# Altium PCB UKU205w.PcbDoc (part 2 of 3)
Units mm, origin at the board's own origin, x right, y up, seen from the top; angles counter-clockwise.
Board outline 374.65 x 264.35 mm, 2 copper layers (Top Layer, Bottom Layer); 276 components, 443 nets, 1000 pads, 796 vias.
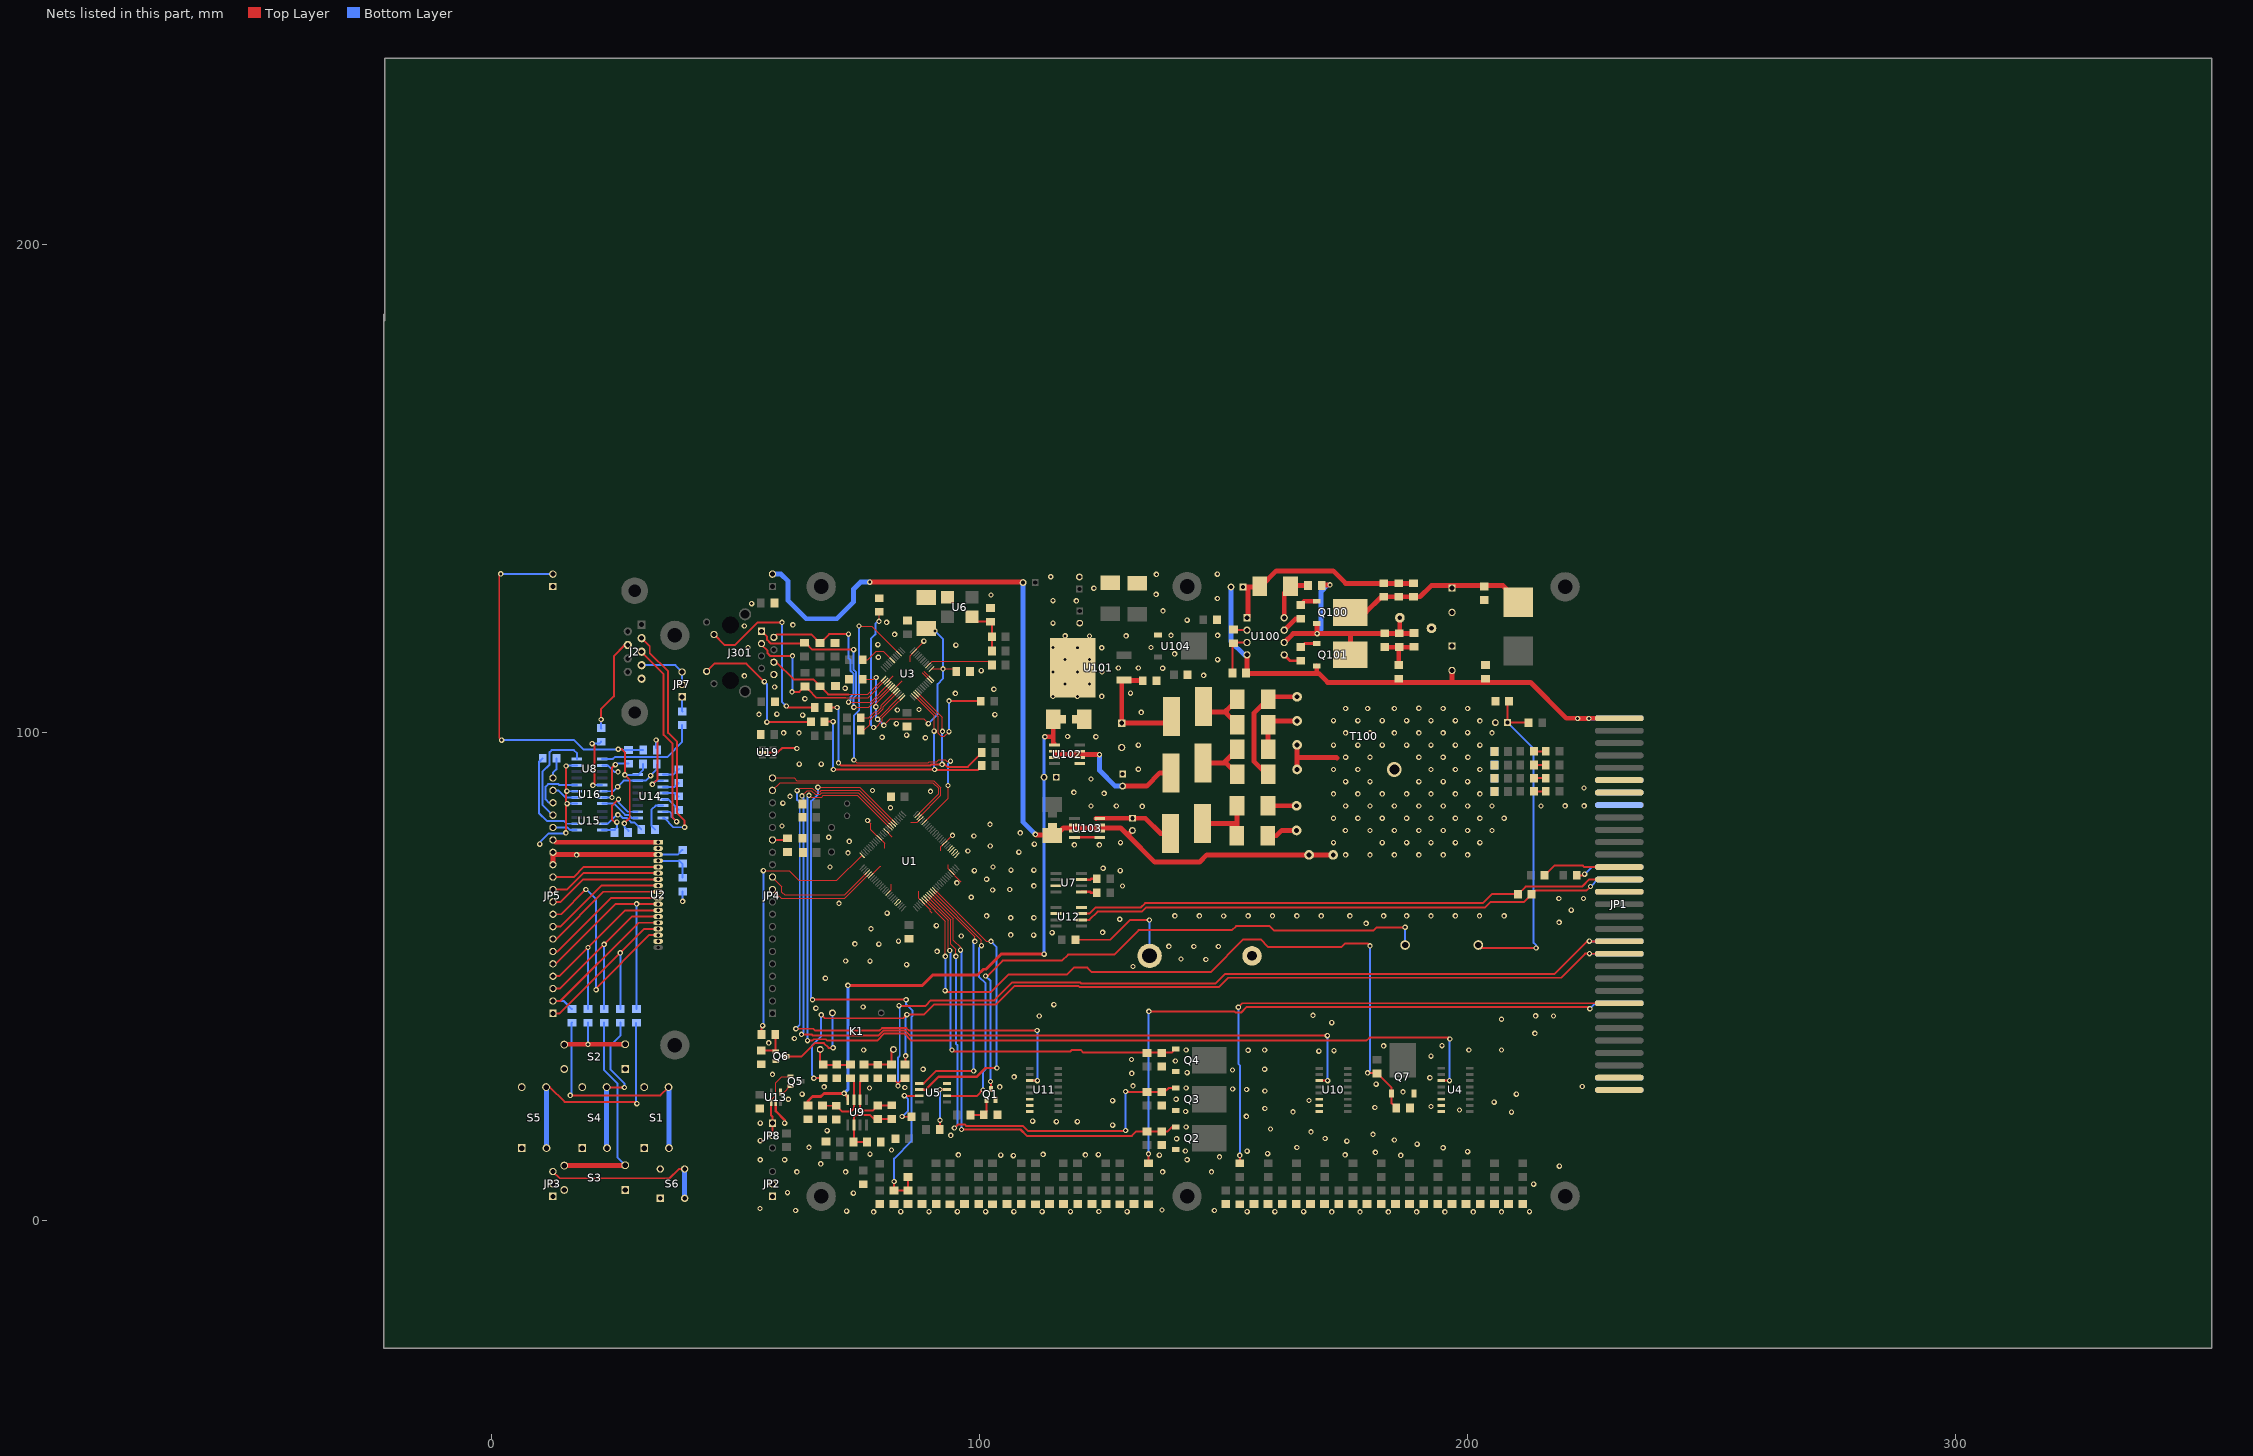
[diagram p2: the nets of this part, all layers, seen from the top]

## Via types
v1: diameter 1.1, hole 0.6, Top Layer to Bottom Layer, 795 vias
v2: diameter 3, hole 2, Top Layer to Bottom Layer, 1 vias

## Nets (pads, with @x,y where several pads share a name; then routed paths per layer and width w, separated by ;. In a path a pad name is that pad's centre, name@x,y a point inside that pad or via, vN(x,y) a via of type N, cw(c..) or ccw(c..) an arc to the next point about the centre after c; other vN are vias at no path point) (continued)
+IAKB: JP1.39 JP1.40 R62.1 R63.2 | length 201.7
  Top Layer w0.4: v1@66.3,29.2 66.338,29.162 R63.2@67.893,29.162 ; v1(67.5,42.15) 68.2,41.45 84.3,41.45 v1(85.05,42.2) 88.55,42.2 90.65,44.3 103.35,44.3 107.15,48.1 120.2,48.1 120.45,47.85 149,47.85 150.9,49.75 219.15,49.75 224.1,54.7 v1(225,54.7) 225.025,54.675 JP1.39@231.089,54.675 ; R62.1@84.65,31.95 84.678,31.978 84.8,32.1 v1@84.8,33.5
  Bottom Layer w0.4: v1@66.3,29.2 65.6,29.9 65.6,35.85 67.5,37.75 v1(67.5,42.15) ; v1@84.8,33.5 84.8,41.95 v1(85.05,42.2) ; v1(225,54.7) 225.025,54.675 JP1.40@231.089,54.675
  other v1: 66,29.15 84.8,33.75
+UOUT: 
-5V: C13.1 C16.2 C57.2 C105.2 U9.4 U102.1 | length 127.3
  Top Layer w0.6: C16.2@64.798,23.545 64.798,24.498 65.7,25.4 67.4,25.4 68.05,26.05 v1(72.2,26.05) 72.942,25.308 U9.4@72.942,24.761 ; v1(72.95,48.2) 88.25,48.2 90.35,50.3 99.55,50.3 100.75,51.5 101.3,51.5 104.4,54.6 v1(113.2,54.6)
  Top Layer w1: v1(113.35,99.15) 115.061,99.15 ; C105.2@115.061,102.744 115.061,97.889 U102.1@115.2,97.75
  Bottom Layer w0.6: v1(72.2,26.05) 72.95,26.8 v1(72.95,48.2) ; v1(113.2,54.6) 113.2,99 v1(113.35,99.15)
-5V_IZ: 
-5VIZ: C14.1 C59.2 C107.2 C108.2 JP6.2 T100.8 T100.9 U103.2 U103.3 U103.6 U103.7 | length 181.6
  Top Layer w1: v1(77.45,130.85) 108.85,130.85 C59.2@108.9,130.8 ; v1(111.4,79.15) 111.55,79 C108.2@114.9,79 ; C108.2@114.7,79.05 115.75,79.05 117.15,80.45 128.9,80.45 130.335,79.015 ; C107.2@131.292,79.939 130.368,79.015 130.335,79.015 ; T100.8@172.45,74.95 167.45,74.95 146.55,74.95 145.05,73.45 135.9,73.45 130.335,79.015
  Bottom Layer w1: JP6.2@57.5,132.49 59.26,132.49 60.7,131.05 60.7,127.05 64.4,123.35 70.7,123.35 74.15,126.8 74.15,129.45 75.55,130.85 v1(77.45,130.85) ; C59.2@108.9,130.8 108.9,81.65 v1(111.4,79.15)
-48V: C100.2 C106.2 C114.2 C117.2 JP1.1 JP1.2 Q101.3 R109.2 U100.4 | length 114.3
  Top Layer w1: C114.2@154.7,112.15 169.45,112.15 171.3,110.3 212.9,110.3 220.25,102.95 JP1.1@231.089,102.95 ; U100.4@154.784,115.933 154.784,112.216 154.825,112.175 154.85,112.15 C114.2@154.85,112.2 ; Q101.3@169.069,113.665 169.069,112.331 169.1,112.3 ; C106.2@196.793,112.751 196.793,110.393 196.8,110.385 196.8,110.35 ; v1(222.55,102.9) v1(224.85,102.9)
  Bottom Layer w1: C100.2@151.45,129.85 151.489,129.811 151.489,118.661 154.217,115.933 U100.4@154.784,115.933 ; v1(222.55,102.9) 222.6,102.95 JP1.2@231.089,102.95
-IAKB: JP1.37 JP1.38 R61.2 R62.2 | length 179.6
  Top Layer w0.4: R61.2@81.893,29.162 82.088,29.162 v1@83.25,28 ; v1@83.219,28.031 84.438,29.25 R62.2@84.7,29.25 ; v1(83.45,44.05) 83.5,44 88.9,44 90,45.1 103,45.1 106.7,48.8 120.55,48.8 120.75,48.6 148.35,48.6 150.3,50.55 217.85,50.55 224.55,57.25 v1(224.95,57.25) 225,57.2 JP1.37@231.1,57.2
  Bottom Layer w0.4: v1@83.25,28 83.25,33.4 83.6,33.75 83.6,43.9 v1(83.45,44.05) ; v1(224.95,57.25) 224.975,57.225 JP1.38@231.089,57.225
  other v1: 83.25,27.6
-UOUT: 
CANH: JP1.27 R129.2 U12.7 | length 113.1
  Top Layer w0.4: U12.7@120.839,62.882 122.432,62.882 123.75,64.2 133.05,64.2 133.9,65.05 203.1,65.05 204.95,66.9 R129.2@210.2,66.9 ; R129.2@210.312,66.857 211.906,68.45 223.45,68.45 224.9,69.9 JP1.27@231.089,69.9
CANL: JP1.28 R129.1 U12.6 | length 113.7
  Top Layer w0.4: U12.6@120.839,61.612 122.462,61.612 124.15,63.3 133.25,63.3 134.15,64.2 203.6,64.2 204.65,65.25 211.506,65.25 213.856,67.6 224.35,67.6 v1(225.2,68.45)
  Bottom Layer w0.4: v1(225.2,68.45) 226.65,69.9 JP1.28@231.089,69.9
DB4: 
GND: BT1.2 C1.2 C2.2 C3.2 C4.2 C5.2 C6.2 C7.2 C8.2 C9.2 C10.2 C11.1 C12.2 C13.2 C15.1 C16.1 C17.1 C18.2 C19.2 C20.2 C21.1 C22.1 C23.2 C24.1 C25.1 C31.1 C33.1 C34.2 C35.2 C36.1 C37.1 C38.1 C39.1 C40.1 C41.1 C42.2 C43.2 C44.2 C45.2 C46.2 C47.2 C48.2 C49.2 C50.2 C51.2 C52.2 C53.2 C54.2 C55.2 C56.2 C57.1 C58.2 C101.2 C102.2 C104.1 C105.1 C109.1 C110.2 C301.1 C302.1 C303.1 C304.1 D1.1 D3.1 D4.1 D5.1 D7.1 D8.1 J301.8 JP1.11 JP1.12 JP1.13 JP1.14 JP1.59 JP1.60 JP1.61 JP1.62 JP2.1 JP2.2 Q1.2 Q2.3 Q3.3 Q4.3 Q6.2 Q7.3 R10.2 R12.2 R13.2 R14.2 R15.2 R16.2 R23.1 R24.1 R26.1 R27.1 R28.1 R29.1 R36.1 R49.1 R57.1 R58.1 R60.1 R74.2 R75.2 R76.2 R77.2 R78.2 R111.1 R112.1 R113.1 R114.1 R117.1 R118.1 R122.2 R126.2 R127.2 R128.2 T100.4 T100.5 U1.11 U1.15 U1.31 U1.41 U1.55 U1.72 U1.83 U1.97 U3.15 U3.19 U3.35 U3.36 U3.47 U4.6 U4.7 U4.8 U5.4 U6.2 U7.3 U10.6 U10.7 U10.8 U11.6 U11.7 U11.8 U12.2 U12.8 U13.2 U19.2 U101.4 U102.5 U104.1 | length 69.9
  Top Layer w0.25: v1(77,82) 77.7,81.3 77.7,80.136 80.5,77.336 80.5,76.25 ; U1.31@77.645,70.645 79.65,72.65 79.7,72.65 ; U1.11@80.827,79.837 82,78.664 82,78.65 ; U3.15@80.998,110.347 82.301,111.65 ; U1.41@81.181,67.109 81.9,67.828 81.9,68.95 ; U3.19@82.412,108.933 84.129,110.65 ; 85.75,114.55 85.75,115.806 v1@88.55,118.606 ; 85.9,81.6 87.186,81.6 U1.97@87.898,82.312 ; 87.5,67.45 87.5,66.093 89.85,63.743 89.85,63.354 90.142,63.062 ; 88.2,112.25 88.2,112.231 U3.35@89.73,110.7 ; 88.538,112.6 U3.36@90.084,111.054 ; 92.05,75.75 92.05,76.564 94.4,78.914 v1(94.4,78.95) ; 93.5,72.9 93.5,72.114 96.15,69.464 96.15,69.45
  Top Layer w0.4: U19.2@55.434,95.942 58.601,95.942 59.509,96.85 62.4,96.85 v1(62.5,96.75)
  Top Layer w0.5: U13.2@58.2,24.175 58.2,22.4 60,20.6 v1(60,19.95)
  Top Layer w1: T100.4@165.05,92.45 T100.5@165.05,97.5 ; 165.05,94.9 173.099,94.9 173.199,94.8
  other v1: 78.25,1.75 172.15,1.75 177.95,1.75 183.75,1.75 189.55,1.75 195.35,1.75 201.15,1.75 206.95,1.75 83.8,1.8 89.6,1.8 95.4,1.8 101.2,1.8 107,1.8 112.8,1.8 118.6,1.8 130.2,1.8 154.799,1.8 160.499,1.8 166.399,1.8 212.699,1.8 124.4,1.85 72.7,1.9 62.25,2.05 148.1,2.05 137.35,2.15 54.95,2.45 74.1,5.6 60.6,5.7 213.55,7.45 62.5,9.95 72.5,9.95 137.5,9.95 147.5,9.95 218.8,11.15 67.4,11.6 55,12.45 60,12.45 142.5,12.45 149.15,13.05 106.9,13.3 186.299,13.35 104.3,13.4 136.8,13.4 95.6,13.45 121.65,13.45 174.899,13.45 124.3,13.5 113,13.55 77.5,13.6 158.999,13.7 181.1,13.95 199.999,14.1 154.799,14.2 142.15,14.25 81.9,14.45 194.999,14.9 164.999,14.95 65,15 189.65,15.65 175.25,16.25 55,16.35 184.999,16.5 140.35,16.75 170.799,16.8 94.05,17.45 180.6,17.65 167.899,18.15 68.7,18.4 159.6,18.75 142.3,19.15 127.25,19.55 55,19.95 115.7,20.25 120,20.25 110.85,20.35 154.65,21.35 208.999,22.2 164.2,22.25 142.2,22.35 198.35,22.65 158.45,22.95 180.999,23.15 192.5,23.35 205.45,24.25 127.25,24.55 167.499,24.6 60.75,24.85 140.25,24.85 63.6,25.9 209.999,25.9 186.75,26.35 158.45,26.55 154.699,26.85 151.85,26.95 77.4,27.15 142.3,27.15 84.65,27.25 68.1,27.4 104.1,27.4 223.5,27.45 131.4,27.6 181.25,27.95 192.25,29.25 107.05,29.45 57.5,29.95 131.15,30.15 142.5,30.3 151.8,30.85 88.4,31 158.399,31 140.1,32.7 131.1,33 192.499,33.7 169.499,34.7 172.599,34.8 154.999,34.9 76.2,34.95 142.3,34.95 158.4,34.95 200.25,34.95 206.95,34.95 182.799,35.8 194.75,35.85 56.75,36.4 62,37.3 213.8,38.35 172.15,40.55 206.95,41.25 112.2,41.9 217.599,41.9 213.95,41.95 168.3,42.05 66.4,43.5 76.1,43.75 115.2,44.25 68.35,49.65 131.4,52.05 85,52.45 77.5,53.15 72.5,53.2 146.35,53.5 141.25,53.6 91.25,55.15 143.9,56.15 148.9,56.15 138.75,56.2 79.3,56.65 74.4,56.7 83.35,57.25 96.2,58.3 111.05,58.5 106.35,58.55 114.85,59 125.2,59.05 77.7,59.8 91.1,60.45 179.2,60.9 218.75,61.1 128.7,61.75 106.35,62.05 111.1,62.05 150,62.4 101.4,62.45 140,62.45 145,62.45 155,62.45 160,62.45 165,62.45 170,62.45 175.85,62.45 182.8,62.45 187.5,62.45 192.5,62.45 197.5,62.45 202.45,62.45 207.5,62.45 81,63 221.25,63.6 71.15,65 218.7,66 223.75,66 98.25,66.25 102.65,67.75 106.15,67.85 129.25,68.55 111.1,68.6 95.3,69.2 101.4,69.95 98.9,71.7 128.8,71.7 106.4,71.8 111.1,71.8 125.3,72.2 69.3,72.45 102.7,72.45 174.999,74.95 179.999,74.95 184.999,74.95 189.999,74.95 195,74.95 199.999,74.95 73,75.35 108,75.5 97.55,75.75 102.15,76.75 119.4,77 124.5,77 111.2,77.15 128.85,77.45 172.499,77.45 182.5,77.45 187.499,77.45 192.5,77.45 197.499,77.45 202.499,77.45 73.25,77.7 69.05,78.55 98.8,78.8 108.3,79.45 174.95,79.95 180,79.95 185,79.95 190,79.95 195,79.95 200,79.95 204.999,79.95 59.45,80.85 102.1,81.2 172.5,82.45 177.499,82.45 182.499,82.45 187.5,82.45 192.5,82.45 197.499,82.45 202.5,82.45 207.499,82.45 81.7,84.6 133.3,84.9 122.8,84.95 128,84.95 174.999,84.95 179.999,84.95 185,84.95 189.999,84.95 195,84.95 199.999,84.95 205,84.95 215.05,84.95 219.999,85 223.899,85 59.65,85.55 61.1,86.95 172.499,87.45 177.5,87.45 182.5,87.45 187.499,87.45 192.499,87.45 197.499,87.45 202.499,87.45 125.5,87.55 119.3,87.75 89.9,87.95 78,88.15 223.85,88.65 174.999,89.95 179.999,89.95 190,89.95 195,89.95 200,89.95 122.8,90.5 172.499,92.45 177.5,92.45 192.499,92.45 197.5,92.45 202.499,92.45 132.5,92.5 63,93.55 67.5,93.55 175,94.95 179.999,94.95 189.999,94.95 194.999,94.95 200.05,94.95 132.5,97.45 172.499,97.45 177.5,97.45 182.499,97.45 187.499,97.45 192.5,97.45 197.499,97.45 202.5,97.45 88.85,98.95 80,99.05 123.8,99.15 118,99.2 85,99.5 59.8,99.95 62.95,99.95 174.999,99.95 180,99.95 185,99.95 189.999,99.95 194.999,99.95 205,99.95 199.999,100 82.9,101.85 202.499,102.4 172.499,102.45 177.499,102.45 182.5,102.45 187.5,102.45 192.499,102.45 197.499,102.45 63.7,103.6 103.1,103.7 54.75,103.75 58.4,103.8 133.1,104.15 83.1,104.65 87.55,104.75 185,104.95 200,104.95 174.999,104.95 179.499,104.95 194.999,104.95 189.999,105 64.15,106.95 115,107.45 120,107.45 125,107.45 95,108.05 130.9,108.1 102.9,108.9 72.4,109.1 57.95,109.35 117.5,109.95 122.5,109.95 51.75,111.65 145.9,111.75 120,112.4 115.05,112.45 125.05,112.45 100.3,112.7 137.5,113.2 128.4,113.25 132.5,113.25 117.5,114.95 122.5,114.95 148.75,114.95 79.2,115.45 139.95,116.15 120,117.4 125,117.4 52.5,117.45 115,117.45 135.1,117.45 95.1,117.95 79.1,118.05 88.55,118.75 122.5,119.8 117.5,119.85 130,119.85 139.2,119.95 148.75,119.95 82.55,120.15 51.75,121.85 61.7,122.1 115,122.45 80.9,122.6 142.5,123.05 137.55,124.95 53.25,126.45 119.8,127 115,127.05 148.7,127.5 102.3,128.2 136.15,128.35 123.4,129.6 114.55,131.95 136.2,132.45 148.7,132.5
  other v2: 185,92.45
I1: JP1.47 R6.2 | length 110.5
  Top Layer w0.4: v1(153,43.7) 153.825,44.525 JP1.47@231.075,44.525 ; v1(153.3,13.35) 153.307,13.343 R6.2@153.307,11.738
  Bottom Layer w0.4: v1(153,43.7) 153,32.1 153.307,31.793 v1@153.307,13.343
I2: JP1.48 R7.2 | length 128.7
  Top Layer w0.4: v1@134.6,13.15 134.607,13.143 R7.2@134.607,11.738 ; v1(134.65,42.85) 152.2,42.85 152.45,42.6 153.55,42.6 154.75,43.8 224.65,43.8 v1(225.05,43.4)
  Bottom Layer w0.4: v1@134.6,13.15 v1@134.6,42.8 ; v1(225.05,43.4) 226.175,44.525 JP1.48@231.089,44.525
  other v1: 134.6,13.65
NetA1_1: A1.1 Q1.3 | length 118.2
  Top Layer w0.4: v1(101.2,50.1) 101.55,50.1 104.7,53.25 116.85,53.25 118.1,54.5 127.55,54.5 132.55,59.5 151.7,59.5 152.55,60.35 159.4,60.35 160.35,59.4 180.65,59.4 181.35,60.1 v1(187.2,60.1) ; v1(102.2,28.5) 102.3,28.5 102.302,28.498 Q1.3@102.302,26.948
  Bottom Layer w0.4: v1(101.2,50.1) 102.2,49.1 v1(102.2,28.5) ; A1.1@187.197,56.462 187.197,60.097 v1(187.2,60.1)
NetA1_2: A1.2 C19.1 R56.1 R57.2 | length 69.5
  Top Layer w0.4: A1.2@202.2,56.4 202.75,55.85 v1(214.05,55.85) ; R57.2@208.5,106.4 208.157,106.057 208.157,102.043 R56.1@212.488,102.043
  Bottom Layer w0.4: C19.1@208.189,102.058 213.55,96.697 213.55,56.9 214.05,56.4 v1(214.05,55.85)
NetBT1_1: BT1.1 D6.1 | length 24.2
  Top Layer w0.4: D6.1@119.595,57.541 126.741,57.541 130.8,61.6 v1(134.75,61.6)
  Bottom Layer w0.4: v1(134.75,61.6) 134.805,61.545 BT1.1@134.805,54.241
NetC9_1: C9.1 C10.1 C20.1 U3.18 U3.23 U3.37 | length 63.9
  Top Layer w0.25: C10.1@76.005,110.948 78.298,110.948 v1@78.65,111.3 ; v1(78.7,105.3) 78.7,105.928 U3.18@82.058,109.286 ; v1(79.05,102.75) 79.058,102.75 U3.23@83.826,107.518 ; v1(80.35,101.5) 81.65,102.8 88.5,102.8 v1(89.45,101.85) ; U3.37@90.084,113.069 94.678,113.069 C9.1@95.195,112.552
  Top Layer w0.4: C20.1@88.8,121.3 90.311,121.339 v1(90.8,120.85)
  Bottom Layer w0.4: v1@78.65,111.3 78.7,111.25 78.7,103.15 79.075,102.775 v1(80.35,101.5) ; v1(89.45,101.85) 89.5,101.9 89.5,101.95 91.35,103.8 91.35,109.95 92.45,111.05 92.45,119.2 v1(90.8,120.85)
  other v1: 78.75,111.3 92.45,113.069
NetC18_1: C18.1 R50.1 R51.1 U6.4 | length 10.3
  Top Layer w0.4: U6.4@98.4,123.75 99.412,122.738 C18.1@102.207,122.738 102.488,122.457 R50.1@102.488,119.643 R51.1@102.488,116.743
NetC22_2: C22.2 K1.3 R61.1 R64.1 | length 8.9
  Top Layer w0.4: R64.1@76.25,31.85 76.362,31.962 R61.1@81.893,31.962 81.893,34.593 K1.3@82.3,35
NetC23_1: C23.1 K1.1 R63.1 R65.1 | length 9
  Top Layer w0.4: K1.1@67.294,35.06 67.294,32.456 67.9,31.85 R65.1@73.45,31.85
NetC24_2: C24.2 C32.2 R59.1 R66.1 U9.6 | length 16.2
  Top Layer w0.4: U9.6@74.212,19.561 74.212,21.162 74.65,21.6 77.55,21.6 78.35,20.8 81.931,20.8 C32.2@81.943,20.812 ; U9.6@74.25,19.65 74.25,16.2 74.15,16.1 74.2,16.05 C24.2@76.85,16.05
NetC26_1: C26.1 U14.3 | length 3.5
  Bottom Layer w0.4: U14.3@35.089,88.863 37.463,88.863 C26.1@38.25,89.65
NetC26_2: C26.2 U14.1 | length 3.7
  Bottom Layer w0.4: U14.1@35.089,91.403 37.203,91.403 C26.2@38.3,92.5
NetC27_1: C27.1 U14.2 | length 14.2
  Top Layer w0.4: v1(32.9,89.4) 33.95,90.45 33.95,98.2 v1(33.65,98.5)
  Bottom Layer w0.4: v1(32.9,89.4) 33.633,90.133 U14.2@35.089,90.133 ; v1(33.65,98.5) 33.65,96.8 C27.1@33.9,96.55
NetC27_2: C27.2 C28.1 JP9.2 R47.1 R48.2 U14.16 | length 99.5
  Top Layer w0.4: v1@1.5,132.55 1.5,98.95 v1(2,98.45) ; v1(25.9,96.6) 26.6,96.6 27.25,95.95 v1(27.25,91.35) 28.25,90.35 28.25,82.5 v1(27.15,81.4)
  Bottom Layer w0.4: v1@1.5,132.55 12.423,132.55 JP9.2@12.488,132.485 ; v1(2,98.45) 16.85,98.45 18.75,96.55 26.65,96.55 ; 26.669,96.531 26.757,96.443 C27.2@31.012,96.443 ; v1(27.15,81.4) 27.15,80.706 R47.1@28.012,79.843 ; v1(27.25,91.35) 30,91.35 30.995,92.345 C28.1@30.995,93.548
  other v1: 1.8,132.55
NetC28_2: C28.2 C30.2 J2.5 JP9.1 U8.2 U14.15 U15.7 U16.2 | length 28
  Bottom Layer w0.4: U15.7@22.589,81.318 23.768,81.318 25.5,83.05 26.25,83.05 26.8,82.5 27.65,82.5 27.769,82.381 ; U16.2@22.611,87.982 24.832,87.982 v1(25.761,88.911) 27,90.15 31.5,90.15 33.8,92.45 C28.2@33.8,93.548 ; U8.2@22.611,93.282 23.768,93.282 25.1,91.95 v1(25.85,91.95) ; 27.7,82.45 27.769,82.381 ; C30.2@30.605,80.152 29.157,81.6 28.55,81.6 27.769,82.381
  other v1: 25.8,83.15 32.535,91.185
NetC29_1: C29.1 U14.4 | length 3.4
  Bottom Layer w0.4: U14.4@35.089,87.593 37.507,87.593 C29.1@38.2,86.9
NetC29_2: C29.2 U14.5 | length 4.1
  Bottom Layer w0.4: U14.5@35.089,86.323 36.129,86.323 C29.2@38.298,84.155
NetC30_1: C30.1 U14.6 | length 7
  Bottom Layer w0.4: C30.1@33.405,80.152 32.75,80.807 32.75,84.25 33.553,85.053 U14.6@35.089,85.053
NetC32_1: C32.1 R59.2 R64.2 U9.2 | length 13.7
  Top Layer w0.4: R64.2@76.293,29.162 75.482,28.351 U9.2@75.482,24.761 75.482,22.868 75.85,22.5 78.019,22.5 79.131,23.612 C32.1@81.943,23.612
NetC35_1: C35.1 R60.2 R65.2 U9.3 | length 13.7
  Top Layer w0.4: R60.2@67.757,23.538 67.782,23.512 C35.1@70.593,23.512 71.756,22.35 73.65,22.35 74.212,22.912 U9.3@74.212,24.761 74.212,28.443 R65.2@73.493,29.162
NetC100_1: C100.1 D100.1 R100.2 R101.2 R102.2 U100.1 | length 43.9
  Top Layer w1: C100.1@153.989,129.858 157.508,129.858 160.8,133.15 172.45,133.15 175,130.6 182.95,130.6 R102.2@189,130.6 ; U100.1@154.8,123.5 155,123.7 155,129.85
NetC101_1: C101.1 C109.2 L100.2 U101.1 | length 23.6
  Top Layer w0.7: L100.2@139.268,103.343 L100.2@139.293,103.343
  Top Layer w1: C109.2@133.405,110.648 133.352,110.7 129.5,110.7 129.093,110.293 C101.1@129.093,101.951 137.901,101.951 139.28,103.33 L100.2@139.293,103.343
NetC103_1: C103.1 FU100.2 Q100.4 R100.1 R101.1 R102.1 R103.1 | length 38.2
  Top Layer w1: Q100.4@175.919,124.65 179.15,124.65 182.35,127.85 189.15,127.85 190.249,127.85 192.549,130.15 197.4,130.15 207.25,130.15 210.2,127.2 FU100.2@210.2,126.8
NetC103_2: C103.2 C106.1 R103.2 R109.1 T100.1
NetC104_2: C104.2 L101.2 U102.2 U102.3 U102.6 U102.7 | length 29.6
  Top Layer w1: 115.3,95.55 124.5,95.55 v1(124.55,95.5) ; C104.2@129.25,89.05 134.189,89.039 136.893,91.743 L101.2@139.168,91.743
  Bottom Layer w1: v1(124.55,95.5) 124.55,92.25 127.75,89.05 C104.2@129.25,89.05
NetC107_1: C107.1 L102.2 U103.8 | length 16.5
  Top Layer w1: U103.8@123.85,82.4 123.889,82.439 133.961,82.439 137.057,79.343 L102.2@139.068,79.343
NetC111_1: C111.1 D100.2 U100.8 | length 10.6
  Top Layer w1: U100.8@162.403,123.553 U100.8@162.404,123.553 162.404,128.654 163.902,130.152 C111.1@167.295,130.152
NetC111_2: C111.2 Q100.3 Q101.4 R106.1 R107.1 R108.1 T100.2 U100.6 | length 49.1
  Top Layer w1: U100.6@162.404,118.473 164.231,120.3 188.881,120.3 R106.1@188.994,120.413 ; v1@169.15,120.4 Q100.3@169.15,122.3 ; C111.2@170.05,130.25 171.3,130.25 v1@171.35,130.3 ; Q101.4@175.9,116 176,116.1 176,120.3 ; R107.1@186.1,120.3 T100.2@186.1,123.55
  Bottom Layer w1: v1(169.15,120.3) 169.95,121.1 169.95,128.9 v1@171.35,130.3
  other v1: 171.8,130.3
NetC114_1: C114.1 R105.1 U100.3 | length 9
  Top Layer w0.4: C114.1@151.788,112.243 151.788,118.119 R105.1@152.007,118.338 152.142,118.473 U100.3@154.784,118.473
NetC117_1: C117.1 R106.2 R107.2 R108.2 | length 10
  Top Layer w1: R108.2@182.8,117.5 189.1,117.5 R106.2@189.15,117.45 ; C117.1@185.893,113.862 185.893,117.443 R107.2@185.95,117.5
NetD101_1: D101.1 D102.2 T100.3 | length 24
  Top Layer w1: D102.2@158.95,91.35 156.2,94.1 156.2,104 159.55,107.35 T100.3@165.05,107.35
NetD101_2: D101.2 D103.2 L100.1 | length 12.3
  Top Layer w1: L100.1@145.872,105.375 146.997,104.25 150.55,104.25 ; D103.2@152.809,101.656 152.844,101.656 150.5,104 150.5,104.509 D101.2@152.809,106.819
NetD102_1: D102.1 D104.1 L101.1 | length 11.9
  Top Layer w1: L101.1@145.772,93.775 150.465,93.775 ; D102.1@152.809,91.431 150.4,93.841 150.4,94.185 D104.1@152.809,96.594
NetD103_1: D103.1 D104.2 T100.6 | length 11.4
  Top Layer w1: D104.2@159.15,96.5 159.107,96.543 159.1,96.55 159.1,101.65 159.85,102.4 T100.6@165.05,102.4
NetD105_1: D105.1 T100.7 | length 5.9
  Top Layer w1: D105.1@159.1,85 T100.7@164.95,85
NetD105_2: D105.2 D106.2 L102.1 | length 13.2
  Top Layer w1: L102.1@145.672,81.375 152.625,81.375 152.691,81.309 ; D106.2@152.691,78.856 152.691,84.991 D105.2@152.7,85
NetD106_1: D106.1 T100.10 | length 6.4
  Top Layer w1: D106.1@159.05,78.865 D106.1@159.041,78.856 160.806,78.856 161.9,79.95 T100.10@164.95,79.95
NetJ2_2: J2.2 U14.8 | length 47.6
  Top Layer w0.4: J2.2@30.684,119.361 32.35,117.695 32.35,116.3 36.1,112.55 36.1,99.95 37.95,98.1 37.95,83.5 39.5,81.95 v1(39.5,80.6)
  Bottom Layer w0.4: U14.8@35.089,82.513 35.287,82.513 37.2,80.6 v1(39.5,80.6)
NetJ2_3: J2.3 U14.7 | length 41.8
  Top Layer w0.4: J2.3@30.684,116.591 30.684,116.466 35.2,111.95 35.2,99.55 37.05,97.7 37.05,82.55 v1(37.85,81.75)
  Bottom Layer w0.4: U14.7@35.089,83.783 36.467,83.783 36.85,83.4 36.85,82.75 v1(37.85,81.75)
NetJ2_4: J2.4 JP7.2 JP7.3 | length 11.4
  Bottom Layer w0.4: J2.4@30.684,113.821 37.589,113.821 39,112.41 JP7.2@39,109.95
NetJ2_7: J2.7 R52.2 | length 19.8
  Top Layer w0.4: v1@22.4,102.3 22.4,104.85 25,107.45 25,115.7 27.276,117.976 J2.7@27.844,117.976
  Bottom Layer w0.4: v1@22.4,102.3 22.4,100.85 R52.2@22.45,100.8
  other v1: 22.4,102.7
NetJ301_1: J301.1 R301.1 U3.17 | length 42.4
  Top Layer w0.25: v1(74.2,105.2) 77.265,105.2 U3.17@81.705,109.64
  Top Layer w0.4: J301.1@55.25,120.795 56.4,119.645 56.4,119 57.1,118.3 64,118.3 64.4,118.3 65.7,117 v1(74.15,117)
  Bottom Layer w0.4: v1(74.15,117) 74.15,112.855 74.65,112.355 74.65,107.644 74.15,107.144 74.15,105.25 v1(74.2,105.2)
NetJ301_2: J301.2 R302.2 U3.16 | length 41.7
  Top Layer w0.25: v1(73.1,106.25) 77.608,106.25 U3.16@81.351,109.993
  Top Layer w0.4: J301.2@57.8,119.525 58.425,120.15 65.45,120.15 67.25,118.35 69.1,120.2 v1(73.1,120.2)
  Bottom Layer w0.4: v1(73.1,106.25) 73.5,106.65 73.5,107.272 74.1,107.872 74.1,112.128 73.5,112.728 73.5,114.8 73.1,115.2 v1(73.1,120.2)
NetJ301_3: J301.3 R303.1 U3.14 | length 37.3
  Top Layer w0.25: 72.45,107.15 77.094,107.15 U3.14@80.644,110.7
  Top Layer w0.4: J301.3@55.25,118.255 55.25,118.05 56.5,116.8 56.5,116.25 57,115.75 v1(61.6,115.75) ; v1(61.5,108.35) 63.019,108.35 R303.1@64.157,109.488 R303.1@64.897,108.747 ; R303.1@64.9,108.75 66.5,107.15 72.45,107.15
  Bottom Layer w0.4: v1(61.5,108.35) 61.6,108.45 v1(61.6,115.75)
NetJ301_6: J301.6 R304.2 U3.13 | length 26.5
  Top Layer w0.25: 73.1,107.85 77.087,107.85 U3.13@80.29,111.054
  Top Layer w0.4: J301.6@57.8,114.445 58.305,114.445 61.85,110.9 65.856,110.9 68.906,107.85 73.1,107.85
NetJ301_10: J301.10 R305.1 | length 40.2
  Top Layer w0.4: J301.10@45.52,120.12 47.64,118 49.85,118 54.45,122.6 v1(59.45,122.6) ; v1(60.35,105.45) 60.657,105.143 R305.1@66.188,105.143
  Bottom Layer w0.4: v1(59.45,122.6) 59.45,106.35 v1(60.35,105.45)
NetJ301_11: J301.11 R306.1 | length 31.8
  Top Layer w0.4: J301.11@44,112.55 45.6,114.15 52.15,114.15 v1(55.85,110.45) ; v1(56.35,102.15) R306.1@65.6,102.15
  Bottom Layer w0.4: v1(55.85,110.45) 56.35,109.95 v1(56.35,102.15)
NetJP1_16: JP1.16
NetJP1_29: JP1.29
NetJP3_1: JP3.1 JP3.2 R90.2 S1.1 S2.1 S3.1 S4.1 S5.1 S6.1 U2.2 U8.7 U16.5 U16.7 | length 28.3
  Top Layer w0.4: v1(15.15,79.45) 15.2,79.5 v1(15.2,93.15)
  Bottom Layer w0.4: v1(9.8,77.15) 9.8,77.55 11.55,79.3 15,79.3 v1(15.15,79.45) ; v1(15.2,93.15) 15.332,93.282 U8.7@17.411,93.282 ; v1(15.35,88) 15.368,87.982 U16.7@17.411,87.982 ; v1(15.408,85.442) U16.5@17.411,85.442 ; v1@39.1,65.8 39.107,65.807 R90.2@39.107,67.462
  other v1: 39.1,65.4
NetJP3_3: JP3.3 S6.2 | length 34.4
  Top Layer w0.4: JP3.3@12.489,10.021 13.86,8.65 36.4,8.65 38.291,10.541 S6.2@39.501,10.541
  Bottom Layer w1: S6.2@39.5,4.5 39.501,4.501 S6.2@39.501,10.541
NetJP4_15: JP4.15 R29.2 | length 3.3
  Top Layer w0.4: JP4.15@57.5,78.01 60.283,78.01 R29.2@60.614,78.341
NetJP5_1: JP5.1 R4.2 U2.15 | length 40.3
  Top Layer w0.4: JP5.1@12.5,42.45 13.9,42.45 31.21,59.76 U2.15@34.075,59.76
  Bottom Layer w0.4: v1(26.3,54.85) 26.317,54.833 R4.2@26.317,43.338
NetJP5_2: JP5.2 R1.2 U2.14 | length 32.8
  Top Layer w0.4: JP5.2@12.5,44.99 14.04,44.99 30.08,61.03 U2.14@34.075,61.03
  Bottom Layer w0.4: JP5.2@12.5,44.99 14.741,44.99 R1.2@16.393,43.338
NetJP5_3: JP5.3 R3.2 U2.13 | length 41
  Top Layer w0.4: JP5.3@12.5,47.53 13.93,47.53 v1(23,56.6) 28.7,62.3 U2.13@34.075,62.3
  Bottom Layer w0.4: v1(23,56.6) 23.009,56.591 R3.2@23.009,43.338
NetJP5_4: JP5.4 R2.2 U2.12 | length 39.8
  Top Layer w0.4: JP5.4@12.5,50.07 13.82,50.07 27.32,63.57 U2.12@34.075,63.57
  Bottom Layer w0.4: v1(19.7,55.95) 19.701,55.949 R2.2@19.701,43.338
NetJP5_5: JP5.5 R5.2 U2.11 | length 48.2
  Top Layer w0.4: JP5.5@12.5,52.61 13.06,52.61 25.29,64.84 U2.11@34.075,64.84
  Bottom Layer w0.4: R5.2@29.625,43.338 29.625,64.875 v1(29.65,64.9)
NetJP5_6: JP5.6 U2.10 | length 26.1
  Top Layer w0.4: JP5.6@12.5,55.15 13.45,55.15 24.41,66.11 U2.10@34.075,66.11
NetJP5_7: JP5.7 U2.9 | length 25.6
  Top Layer w0.4: JP5.7@12.5,57.69 13.14,57.69 22.83,67.38 U2.9@34.075,67.38
NetJP5_8: JP5.8 U2.8 | length 25.1
  Top Layer w0.4: JP5.8@12.5,60.23 14.03,60.23 22.45,68.65 U2.8@34.075,68.65
NetJP5_9: JP5.9 U2.16 | length 47.9
  Top Layer w0.4: JP5.9@12.5,62.77 14.17,62.77 v1(19.25,67.85) ; v1(21.35,47.3) 21.35,47.65 32.19,58.49 U2.16@34.075,58.49
  Bottom Layer w0.4: v1(19.25,67.85) 19.35,67.85 21.35,65.85 v1(21.35,47.3)
NetJP5_10: JP5.10 U2.7 | length 23.5
  Top Layer w0.4: JP5.10@12.5,65.31 14.11,65.31 18.72,69.92 U2.7@34.075,69.92
NetJP5_11: JP5.11 U2.6 | length 23
  Top Layer w0.4: JP5.11@12.5,67.85 15.4,67.85 18.74,71.19 U2.6@34.075,71.19
NetJP5_12: JP5.12 U2.5 | length 22.4
  Top Layer w0.4: JP5.12@12.5,70.39 16.74,70.39 18.81,72.46 U2.5@34.075,72.46
NetJP5_13: JP5.13 JP5.14 R89.1 U2.3 | length 29.9
  Top Layer w1: JP5.13@12.45,72.95 12.5,73 12.5,75.45 12.5,75 U2.3@34.075,75
  Bottom Layer w0.4: U2.3@34.075,75 38.1,75 R89.1@39.05,75.95
  other v1: 17.35,74.95
NetJP5_15: JP5.15 U2.1 | length 21.8
  Top Layer w1: JP5.15@12.5,78.1 13.06,77.54 U2.1@34.075,77.54
NetJP5_16: JP5.16 U15.1 | length 5.2
  Bottom Layer w0.4: JP5.16@12.55,80.6 JP5.16@12.5,80.55 15.5,80.55 16.002,80.048 U15.1@17.389,80.048
NetJP5_17: JP5.17 U8.8 | length 21.6
  Bottom Layer w0.4: JP5.17@12.5,83.09 10.35,85.24 10.35,91.95 11.8,93.4 11.8,95.95 12.25,96.4 16.8,96.4 17.45,95.75 17.45,94.65 U8.8@17.4,94.6
NetJP5_18: JP5.18 U16.8 | length 11.1
  Bottom Layer w0.4: JP5.18@12.5,85.65 JP5.18@12.5,85.63 11.67,85.63 11,86.3 11,88.95 11.5,89.45 13.6,89.45 13.798,89.252 U16.8@17.411,89.252
NetJP5_19: JP5.19 U16.6 | length 5.5
  Bottom Layer w0.4: JP5.19@12.5,88.17 13.58,88.17 15.038,86.712 U16.6@17.411,86.712
NetJP5_20: JP5.20 R43.1 | length 4.3
  Bottom Layer w0.4: JP5.20@12.5,90.71 12.5,91.75 13.212,92.462 R43.1@13.212,94.743
NetJP7_1: JP7.1 R53.2 | length 3
  Bottom Layer w0.4: JP7.1@38.989,107.341 38.989,104.411 R53.2@39.05,104.35
NetJP8_1: JP8.1 JP8.2 Q5.1 U13.1 | length 14.9
  Top Layer w0.25: U13.1@57.25,24.175 57.25,24.75 58.15,25.65 58.15,28.25 59.394,29.494 Q5.1@61.195,29.494
  Top Layer w0.4: U13.1@57.25,24.175 57.25,21.55 57.5,21.3 JP8.2@57.5,17.41
NetK1_5: K1.5 Q6.3 | length 18.3
  Top Layer w0.4: Q6.3@60.398,33.648 63.498,33.648 66.2,36.35 68.05,36.35 69,35.4 v1(69.95,35.4)
  Bottom Layer w0.4: K1.5@69.794,42.56 69.794,35.556 v1(69.95,35.4)
NetQ1_1: Q1.1 R34.2 R36.2 | length 6
  Top Layer w0.4: R34.2@98.088,21.643 100.799,21.643 R36.2@100.812,21.657 101.352,22.196 Q1.1@101.352,24.748
NetQ5_2: Q5.2 U13.4 | length 2.6
  Top Layer w0.25: U13.4@59.15,26.325 59.926,26.325 Q5.2@61.195,27.594
NetQ6_1: Q6.1 R35.2 R58.2 | length 6.7
  Top Layer w0.4: R58.2@55.207,34.838 57.959,34.838 Q6.1@58.198,34.598 58.088,34.709 R35.2@58.088,38.143
NetQ100_1: Q100.1 R104.2 | length 3.7
  Top Layer w1: R104.2@165.7,126.15 166.485,126.935 Q100.1@169.069,126.935
NetQ101_1: Q101.1 R110.2 | length 3.6
  Top Layer w0.6: R110.2@165.807,117.538 166.569,118.3 Q101.1@169.05,118.3
NetR1_1: R1.1 S1.2 | length 48.5
  Top Layer w0.4: v1(16.05,25.65) 34.512,25.65 S1.2@36.203,27.341
  Bottom Layer w0.4: v1(16.05,25.65) 16.35,25.95 16.35,40.494 R1.1@16.393,40.538
  Bottom Layer w1: S1.2@36.2,27.45 36.256,27.394 36.283,27.367 S1.2@36.283,14.841
NetR2_1: R2.1 S2.2 | length 16.9
  Top Layer w1: S2.2@14.889,36.133 S2.2@27.309,36.133
  Bottom Layer w0.4: v1(19.7,36.1) 19.701,36.101 R2.1@19.701,40.538
NetR3_1: R3.1 S3.2 | length 43.5
  Top Layer w1: S3.2@14.809,11.253 S3.2@27.303,11.253
  Bottom Layer w0.4: R3.1@23.009,40.538 23.009,30.791 25.75,28.05 25.75,12.892 S3.2@27.309,11.333
NetR4_1: R4.1 S4.2 | length 31.5
  Top Layer w0.4: S4.2@23.503,27.341 23.594,27.25 v1(27.15,27.25)
  Bottom Layer w0.4: R4.1@26.317,40.538 26.317,37.867 24.35,35.9 24.35,30.9 27.15,28.1 v1(27.15,27.25)
  Bottom Layer w1: S4.2@23.503,27.341 23.503,14.921 S4.2@23.583,14.841
NetR5_1: R5.1 S5.2 | length 49.1
  Top Layer w0.4: S5.2@11.103,27.341 11.859,27.341 14.9,24.3 29.35,24.3 v1(29.7,23.95)
  Bottom Layer w0.4: R5.1@29.5,40.5 29.5,24.15 v1(29.7,23.95)
  Bottom Layer w1: S5.2@11.1,27.3 11.183,27.217 S5.2@11.183,14.841
NetR33_1: R33.1 U3.39 | length 13.8
  Top Layer w0.25: U3.39@89.377,113.776 90.25,114.65 101.681,114.65 R33.1@102.488,113.843
NetR37_1: R37.1 R306.2 U3.26 | length 58.7
  Top Layer w0.25: U3.26@86.548,107.518 90.65,103.417 v1(90.65,100.3)
  Top Layer w0.4: R306.2@68.988,102.243 69.907,102.243 69.95,102.2 v1(69.95,102.25) ; v1(70,92.45) 90.55,92.45 v1@90.65,92.35 ; v1@90.636,92.364 99.609,92.364 R37.1@100.488,93.243
  Bottom Layer w0.4: v1(69.95,102.25) 69.95,92.5 v1(70,92.45) ; v1@90.65,92.35 v1(90.65,100.3) v1@90.7,100.35
  other v1: 90.75,92.45
NetR38_1: R38.1 R305.2 U3.28 | length 61.3
  Top Layer w0.25: U3.28@87.255,108.225 92.35,103.131 v1(92.35,100.25)
  Top Layer w0.4: R305.2@68.988,105.143 70.743,105.143 v1(70.75,105.15) ; v1(71.05,93.8) 71.6,93.25 89.8,93.25 90.05,93.5 92.85,93.5 93.35,93 97.55,93 R38.1@100.5,95.95
  Bottom Layer w0.4: v1(70.75,105.15) 71.05,104.85 v1(71.05,93.8) ; v1(92.3,93.5) 92.3,100.2 v1(92.35,100.25)
NetR39_1: R39.1 U3.27 | length 25.9
  Top Layer w0.25: U3.27@86.902,107.872 91.5,103.274 91.5,99.85 92.1,99.25 92.75,99.25 v1(93.7,100.2)
  Top Layer w0.4: v1(93.7,106.5) 100.431,106.5 R39.1@100.488,106.443
  Bottom Layer w0.4: v1(93.7,100.2) v1(93.7,106.5)
NetR40_2: R40.2 U7.7 | length 3.2
  Top Layer w0.5: U7.7@120.839,69.882 122.682,69.882 122.857,70.057 R40.2@123.962,70.057
NetR41_2: R41.2 U7.5 | length 3.2
  Top Layer w0.5: U7.5@120.839,67.342 122.608,67.342 122.793,67.157 R41.2@123.962,67.157
NetR42_1: R42.1 U3.21 | length 11.4
  Top Layer w0.25: R42.1@75.612,100.557 76.307,100.557 77.4,101.65 77.4,102.507 78.793,103.9 79.166,103.9 80.2,104.934 80.2,105.307 U3.21@83.119,108.225
NetR43_2: R43.2 U15.2 | length 20.2
  Bottom Layer w0.4: R43.2@10.412,94.743 9.65,93.981 9.65,83.5 11.3,81.85 14.8,81.85 15.332,81.318 U15.2@17.389,81.318
NetR44_1: R44.1 U3.20 | length 9.7
  Top Layer w0.25: R44.1@75.612,103.057 77.243,103.057 78.053,103.867 78.486,104.3 79,104.3 79.8,105.1 79.8,105.614 U3.20@82.765,108.579
NetR45_1: R45.1 U3.7 | length 7.5
  Top Layer w0.25: R45.1@76.012,114.957 77.057,114.957 78.75,116.65 80.245,116.65 U3.7@82.058,114.837
NetR47_2: R47.2 U14.10 U15.8 | length 15.8
  Top Layer w0.4: v1(25.6,81.65) 25.15,81.65 24.65,82.15 24.65,85.05 25.428,85.828 v1(25.95,86.35)
  Bottom Layer w0.4: U15.8@22.589,80.048 25.002,80.048 R47.2@25.05,80 ; R47.2@25.2,80 R47.2@25.05,80 ; v1(25.6,81.65) 25.6,80.55 25.2,80.15 25.053,80.003 R47.2@25.05,80 ; v1(25.95,86.35) 25.95,85.65 27.817,83.783 U14.10@29.889,83.783
NetR48_1: R48.1 U16.3 | length 11.8
  Top Layer w0.4: v1(24.612,86.712) 24.612,92.762 v1(25.3,93.45)
  Bottom Layer w0.4: U16.3@22.611,86.712 v1(24.612,86.712) ; v1(25.3,93.45) 25.488,93.638 R48.1@27.993,93.638
NetR49_2: R49.2 U3.24 | length 33.1
  Top Layer w0.25: v1(78.25,101.05) 78.65,101.05 80.05,102.45 80.05,103.035 82.725,105.711 U3.24@84.18,107.165 ; R49.2@79.393,124.362 79.393,123.157 v1@79.4,123.15
  Bottom Layer w0.4: v1(78.25,101.05) 77.7,101.6 77.7,119.25 78.6,120.15 78.6,122.3 79.4,123.1 v1@79.4,123.15
  other v1: 79.35,122.8
NetR52_1: R52.1 U16.1 | length 12.4
  Top Layer w0.4: v1(20.55,97.75) 21,97.3 v1@21,89.2
  Bottom Layer w0.4: v1(20.55,97.75) 22.006,97.75 R52.1@22.393,98.138 ; v1@21,89.2 21.052,89.252 U16.1@22.611,89.252
  other v1: 20.7,89.2
NetR53_1: R53.1 U8.1 | length 21.3
  Bottom Layer w0.4: U8.1@22.6,94.6 24.8,94.6 25.2,95 35.9,95 38.993,98.093 R53.1@38.993,101.538
NetR72_1: R72.1 U5.3 | length 9.7
  Top Layer w0.4: R72.1@91.809,18.664 91.85,18.706 v1@91.85,20.15 ; v1(91.85,26.85) 91.87,26.83 U5.3@93.296,26.83
  Bottom Layer w0.4: v1@91.85,20.15 v1(91.85,26.85)
  other v1: 91.85,20.55
NetR73_2: R73.2 U5.7 | length 10.1
  Top Layer w0.4: v1(84.1,21.3) 84.136,21.264 R73.2@86.009,21.264 ; v1(84.55,25.6) 84.59,25.56 U5.7@87.596,25.56
  Bottom Layer w0.4: v1(84.1,21.3) 85.3,22.5 85.3,24.8 84.55,25.55 v1(84.55,25.6)
NetR89_2: R89.2 R90.1 U2.4 | length 8.1
  Bottom Layer w0.4: U2.4@34.075,73.73 38.37,73.73 39.107,72.993 R90.1@39.107,70.262
NetR92_2: R92.2 R93.1 | length 2.4
  Top Layer w0.4: R93.1@213.609,96.164 R92.2@216.009,96.164
NetR94_2: R94.2 R95.1 | length 2.4
  Top Layer w0.4: R95.1@213.609,93.364 R94.2@216.009,93.364
NetR96_2: R96.2 R97.1 | length 2.5
  Top Layer w0.4: R97.1@213.55,90.65 213.564,90.664 R96.2@216.009,90.664
NetR98_2: R98.2 R99.1 | length 2.4
  Top Layer w0.4: R99.1@213.609,87.964 R98.2@216.009,87.964
NetR104_1: R104.1 U100.7 | length 4.3
  Top Layer w1: U100.7@162.404,121.013 164.741,123.35 R104.1@165.7,123.35
NetR105_2: R105.2 U100.2 | length 2.8
  Top Layer w0.4: R105.2@152.007,121.138 152.131,121.013 U100.2@154.784,121.013
NetR110_1: R110.1 U100.5 | length 3.9
  Top Layer w0.6: U100.5@162.404,115.933 163.6,114.738 R110.1@165.807,114.738
NetU2_17: U2.17
NetU13_3: 
NetU14_9: U14.9 U16.4 | length 8.7
  Bottom Layer w0.4: U16.4@22.611,85.442 24.958,85.442 25,85.4 ; 24.8,85.4 25.05,85.4 27.3,83.15 28,83.15 28.637,82.513 U14.9@29.889,82.513
NetU103_4: U103.4 U103.5 | length 5.2
  Top Layer w0.5: U103.4@119.4,78.545 U103.5@124.6,78.545
OFF1: JP1.25 R54.2 | length 16.3
  Top Layer w0.4: R54.2@215.788,70.743 217.794,72.75 223.65,72.75 223.95,72.45 JP1.25@231.089,72.45
OFF2: JP1.26 R55.2 | length 9.4
  Top Layer w0.4: R55.2@222.388,70.743 223.743,70.743 v1(224,71)
  Bottom Layer w0.4: v1(224,71) 225.45,72.45 JP1.26@231.089,72.45
P0_0: U1.46
P0_1: U1.47
P0_2: JP4.20 U1.98 | length 43.2
  Top Layer w0.25: JP4.20@57.5,90.71 61.94,90.71 62.5,90.15 90.566,90.15 92,88.716 92,87.121 U1.98@87.545,82.666
P0_3: JP4.19 U1.99 | length 42.6
  Top Layer w0.25: JP4.19@57.5,88.17 59.08,89.75 90.4,89.75 91.6,88.55 91.6,87.428 U1.99@87.191,83.019
P0_5: U1.80
P0_6: U1.79
P0_7: U1.78
P0_8: U1.77
P0_9: U1.76
P0_15: U1.62 U5.6 | length 60.1
  Top Layer w0.25: U1.62@90.726,67.816 101.343,57.2 v1(102.3,57.2)
  Top Layer w0.5: U5.6@87.596,26.83 88.93,26.83 91.6,29.5 99.4,29.5 101.15,31.25 v1(103.5,31.25)
  Bottom Layer w0.4: v1(102.3,57.2) 103.25,56.25 103.4,56.1 v1@103.4,31.3
P0_17: U1.61 U5.2 | length 53.7
  Top Layer w0.25: U1.61@90.373,67.463 100.35,57.486 v1(100.35,56.35)
  Top Layer w0.4: U5.2@93.296,25.56 99.46,25.56 v1(100.65,26.75)
  Bottom Layer w0.4: v1(100.35,56.35) 99.8,55.8 99.8,50 101.2,48.6 101.2,30.95 100.65,30.4 v1(100.65,26.75)
P0_18: U1.60 U5.5 | length 52.5
  Top Layer w0.25: U1.60@90.019,67.109 99,58.129 v1(99,57.2)
  Top Layer w0.4: U5.5@87.596,28.1 88.55,28.1 91.1,30.65 v1(98.75,30.65)
  Bottom Layer w0.4: v1(98.75,30.65) 98.75,56.95 v1(99,57.2)
P0_19: Q2.1 R121.1 R122.1 U1.59 | length 96
  Top Layer w0.25: U1.59@89.666,66.756 94.6,61.822 94.6,57.45 96.05,56 v1(96.05,55.4)
  Top Layer w0.4: v1(96.25,18.65) 108.35,18.65 109.65,17.35 131.2,17.35 132.1,18.25 137.35,18.25 138.5,18.25 139.388,19.138 Q2.1@140.171,19.138
  Bottom Layer w0.4: v1(96.05,55.4) 96.25,55.2 v1(96.25,18.65)
P0_20: Q3.1 R123.1 R126.1 U1.58 | length 105
  Top Layer w0.25: U1.58@89.312,66.402 94.05,61.664 94.05,56.65 95.1,55.6 v1(95.1,54.15)
  Top Layer w0.4: v1(94.8,18.95) 95.55,19.7 96.9,19.7 97.2,19.4 108.85,19.4 109.95,18.3 129.75,18.3 v1@129.95,18.5 ; v1(129.9,26.45) 130,26.35 137.9,26.35 138.688,27.138 Q3.1@140.171,27.138
  Bottom Layer w0.4: v1(94.8,18.95) 95.4,19.55 95.4,35.95 95.1,36.25 v1(95.1,54.15) ; v1(129.9,18.45) v1(129.9,26.45)
P0_21: Q4.1 R124.1 R127.1 U1.57 | length 79.9
  Top Layer w0.25: U1.57@88.959,66.049 93.5,61.507 93.5,55.7 v1(93.85,55.35)
  Top Layer w0.4: v1(94.3,34.95) 94.6,34.65 118.6,34.65 118.9,34.95 120.7,34.95 121.25,34.4 139.35,34.4 Q4.1@140.1,35.15
  Bottom Layer w0.4: v1(93.85,55.35) 94,55.2 94,35.25 v1(94.3,34.95)
P0_22: Q7.1 R125.1 R128.1 U1.56 | length 151
  Top Layer w0.25: U1.56@88.605,65.695 92.95,61.35 v1(92.95,54.15)
  Top Layer w0.4: v1(92.9,47.1) 93.2,46.8 102.25,46.8 105.85,50.4 117.85,50.4 119.3,51.85 122.05,51.85 123,50.9 147.35,50.9 154.05,57.6 157.55,57.6 159.05,56.1 174.2,56.1 174.9,56.8 179.5,56.8 v1(180,56.3) ; v1(179.5,30.25) 181.35,30.25 184.412,27.188 Q7.1@184.412,26.021 184.412,24.015 R128.1@185.391,23.036
  Bottom Layer w0.4: v1(92.9,47.1) 92.95,47.15 v1(92.95,54.15) ; v1(179.5,30.25) 180,30.75 v1(180,56.3)
P0_23: U1.9 U4.3 | length 213.8
  Top Layer w0.25: v1(65,87.15) 65.35,86.8 67.6,86.8 67.95,87.15 74.928,87.15 U1.9@81.534,80.544
  Top Layer w0.4: v1(64.7,36.85) 65.65,36.85 65.95,37.15 68.4,37.15 68.7,36.85 78.95,36.85 80.45,38.35 84.5,38.35 86,36.85 179.25,36.85 179.9,37.5 196.05,37.5 v1(196.35,37.2) ; U4.3@194.57,28.662 196.288,28.662 v1(196.3,28.65)
  Bottom Layer w0.4: v1(64.7,36.85) 64.7,86.85 v1(65,87.15) ; v1(196.3,28.65) 196.3,37.15 v1(196.35,37.2)
P0_24: U1.8 U10.3 | length 191
  Top Layer w0.25: v1(63.55,87.05) 64.6,88.1 65.5,88.1 66.25,87.35 67.3,87.35 67.6,87.65 ; 67.566,87.65 75.136,87.65 U1.8@81.888,80.898
  Top Layer w0.4: v1(63.45,38.15) 65.55,38.15 65.8,37.9 79.222,37.9 80.222,38.9 84.728,38.9 85.728,37.9 v1(171.25,37.9) ; U10.3@169.575,28.655 171.295,28.655 v1(171.3,28.65)
  Bottom Layer w0.4: v1(63.45,38.15) 63.85,38.55 63.85,86.75 v1(63.55,87.05) ; v1(171.25,37.9) 171.25,28.7 v1(171.3,28.65)
P0_25: U1.7 U11.3 | length 134.4
  Top Layer w0.25: v1(62.55,88.1) 63.1,88.65 65.7,88.65 66.45,87.9 67.25,87.9 67.55,88.2 75.293,88.2 U1.7@82.241,81.251
  Top Layer w0.4: v1(62.3,39.3) 65.85,39.3 66.2,38.95 79.494,38.95 79.994,39.45 84.956,39.45 85.456,38.95 v1(111.75,38.95) ; U11.3@110.275,28.655 111.795,28.655 v1(111.8,28.65)
  Bottom Layer w0.4: v1(62.3,39.3) 63.1,40.1 63.1,85.65 62.55,86.2 v1(62.55,88.1) ; v1(111.75,38.95) 111.8,38.9 v1(111.8,28.65)
P0_26: C42.1 D7.2 R71.1 U1.6 | length 129.2
  Top Layer w0.25: v1(66.8,88.8) 75.4,88.8 U1.6@82.595,81.605
  Top Layer w0.4: v1(65.7,45.25) v1(84.9,45.25) ; v1@82.45,7.65 82.45,6.219 C42.1@82.393,6.162 82.401,6.17 85.307,6.17 R71.1@85.307,8.938
  Bottom Layer w0.4: v1(65.7,45.25) 65.45,45.5 65.45,85.95 66.8,87.3 v1(66.8,88.8) ; v1@82.45,7.65 82.45,12.7 86.05,16.3 86,16.35 86,41.7 86.25,41.95 86.25,42.95 84.9,44.3 v1(84.9,45.25)
  other v1: 82.45,8
P0_27: R35.1 U1.25 | length 56.9
  Top Layer w0.25: v1(55.65,71.7) 55.7,71.65 60.95,71.65 62.9,69.7 70.69,69.7 U1.25@75.877,74.887
  Top Layer w0.4: R35.1@55.288,38.143 55.288,39.488 v1@55.35,39.55
  Bottom Layer w0.4: v1@55.35,39.55 55.65,39.85 v1(55.65,71.7)
  other v1: 55.5,39.95
P0_29: JP4.12 U1.29 | length 23.5
  Top Layer w0.25: JP4.12@57.5,70.39 59.45,68.44 59.45,67.3 60,66.75 72.336,66.75 U1.29@76.938,71.352
P0_30: JP4.11 U1.30 | length 22.6
  Top Layer w0.25: JP4.11@57.5,67.85 59.3,66.05 72.343,66.05 U1.30@77.291,70.998
P1_0: U1.95 U3.3 | length 73.7
  Top Layer w0.25: v1(74.2,94.4) 74.75,93.85 89.45,93.85 89.65,94.05 91.2,94.05 91.6,94.45 92.95,94.45 ; v1(75.25,121.85) 77.85,121.85 U3.3@83.5,116.2 ; U1.95@88.605,81.605 93.5,86.5 v1(93.5,89.15) ; 92.95,94.4 93.2,94.15 v1(94,94.15)
  Bottom Layer w0.4: v1(74.2,94.4) 74.2,103.45 75.3,104.55 75.3,105.9 75.25,105.95 v1(75.25,121.85) ; v1(93.5,89.15) 93.5,93.65 v1(94,94.15)